# Altium PCB PCB1.PcbDoc
Units mil, origin at the board's own origin, x right, y up, seen from the top; angles counter-clockwise.
Board outline 6000 x 4000 mil, 2 copper layers (Top Layer, Bottom Layer); 56 components, 30 nets, 112 pads, 0 vias.
Unrouted connection lines stored in the file: 82.
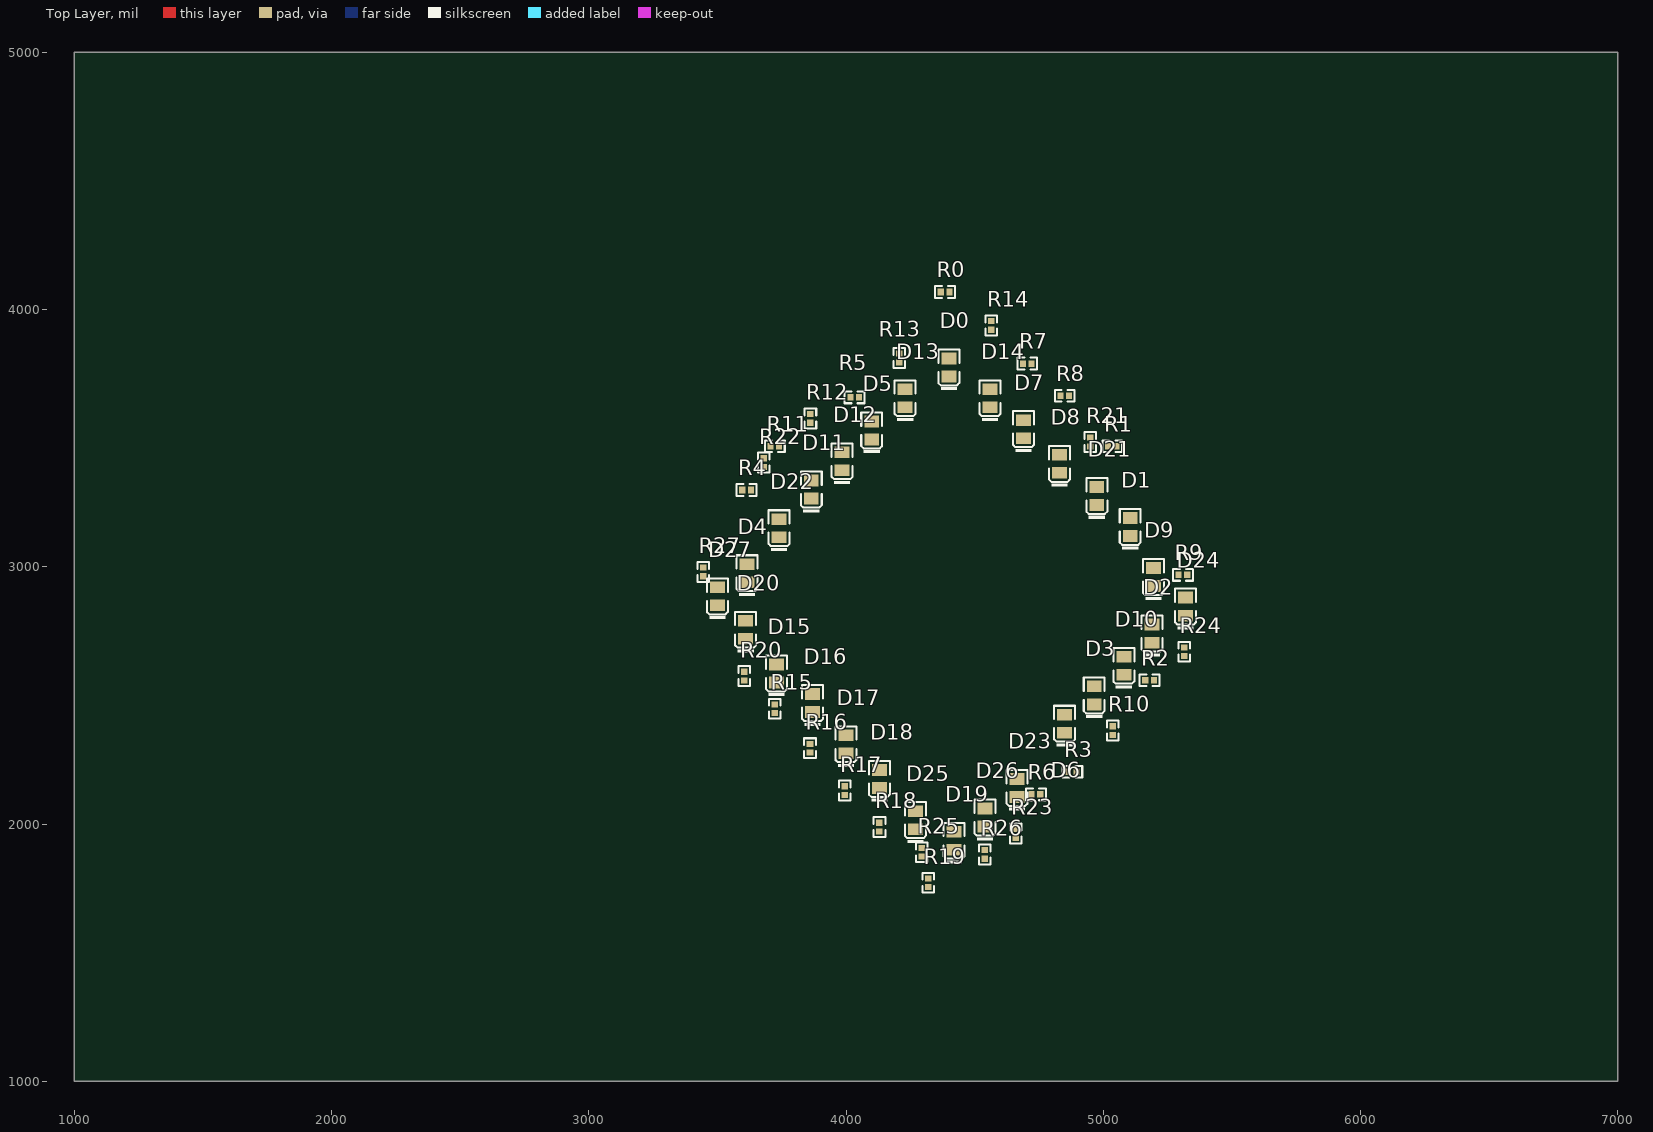
[diagram p0: Top Layer view]
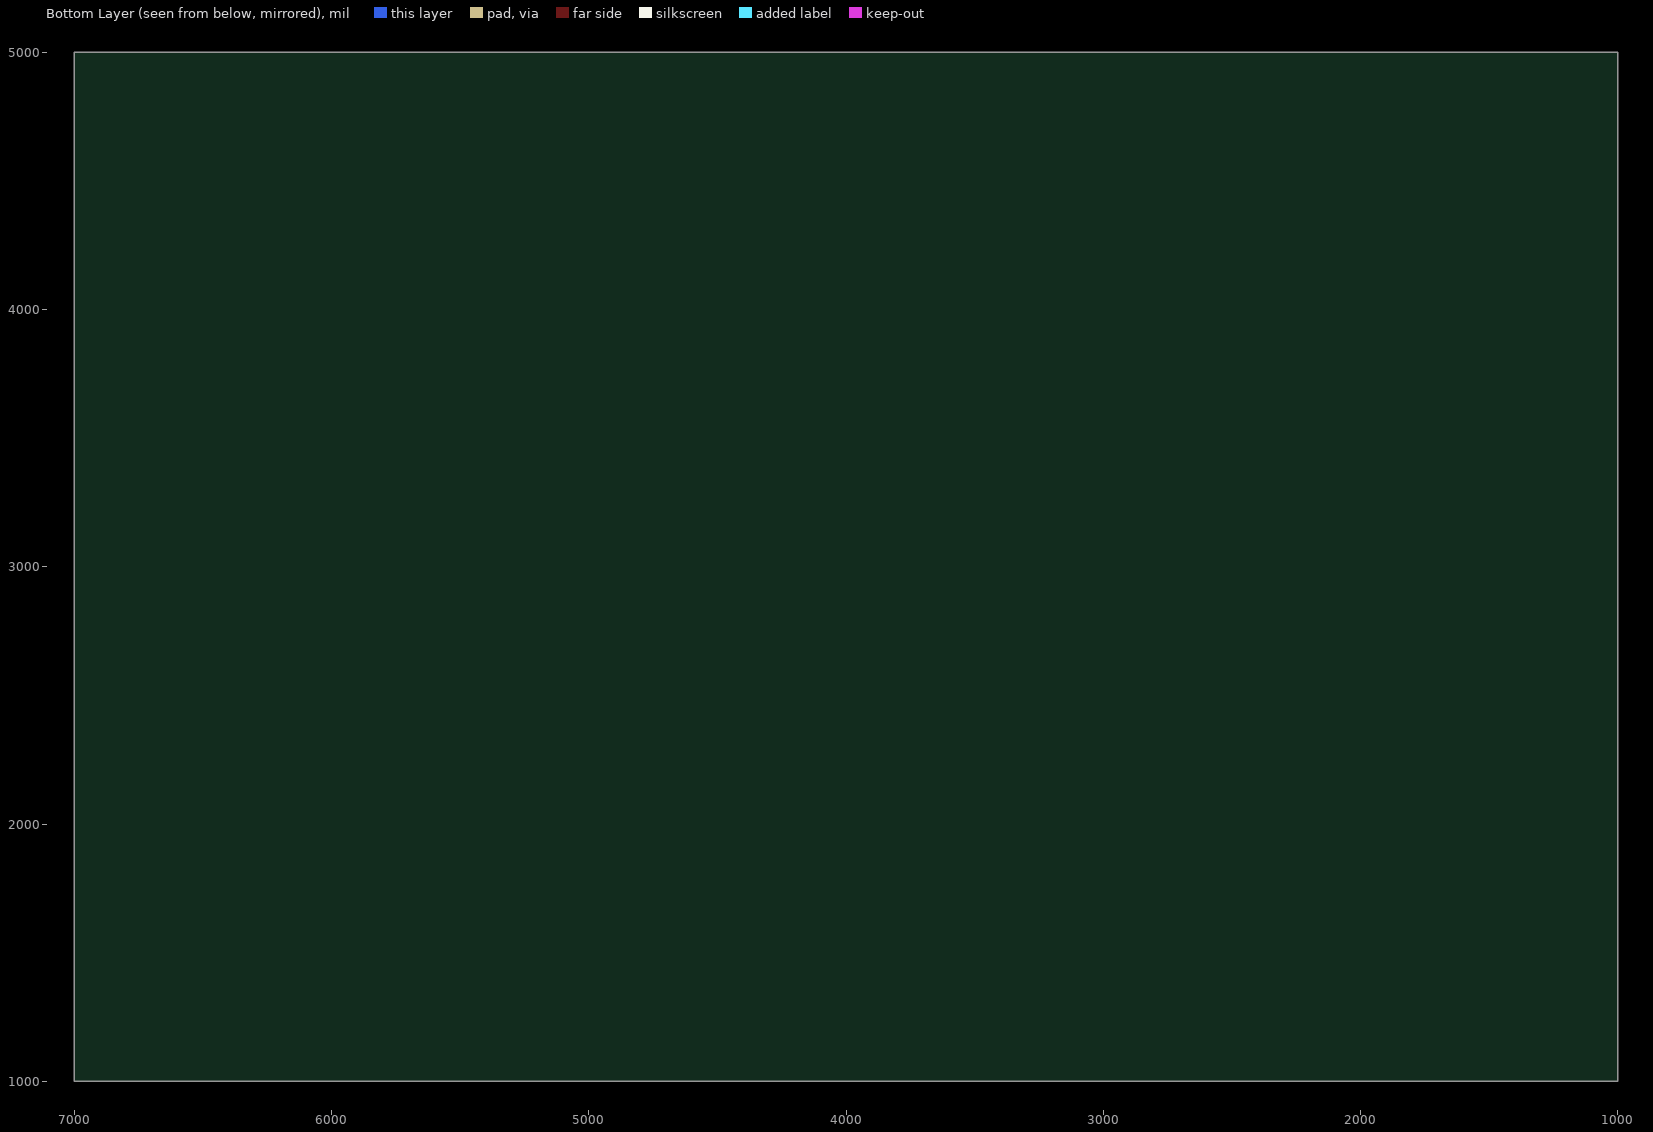
[diagram p1: Bottom Layer view, seen from below]

## Layer stack, top to bottom
Top Solder: solder mask 0.4, Solder Resist, Dk 3.5
Top Layer: signal copper 1.4
Dielectric 1: dielectric 12.6, FR-4, Dk 4.8
Bottom Layer: signal copper 1.4
Bottom Solder: solder mask 0.4, Solder Resist, Dk 3.5

## Board outline
1000,1000 7000,1000 7000,5000 1000,5000

## Design rules (kind name [scope] priority, off if disabled: settings)
Clearance [All] p1: gap=10 ignorepadtopadclearanceinfootprint=FALSE except(0: Arc-Hole Track-Hole SMDPad-Hole THPad-Hole Via-Hole Fill-Hole Poly-Hole Region-Hole Text-Hole)
PolygonConnect [All] p1: connectstyle=Relief reliefconductorwidth=10 reliefentries=4 polygonreliefangle="90 Angle" airgapwidth=10
RoutingVias [All] p1: holewidth=28 width=50 viastyle="Through Hole" minholewidth=28 minwidth=50 maxholewidth=28 maxwidth=50
SolderMaskExpansion [All] p1: expansion=4 istentingtop=FALSE
Width [All] p1: maxlimit=10 minlimit=10 preferedwidth=10
30 further rules are at their usual default settings.

## Components (designator, comment, footprint, x,y, rotation, side; value= is the part's Value field where it differs from the comment)
D0 "0805 Red" 0805_LED_S1 4400,3775.04 r90 top
D1 "0805 Red" 0805_LED_S1 5105,3155 r90 top
D2 "0805 Red" 0805_LED_S1 5190,2740.04 r90 top
D3 "0805 Red" 0805_LED_S1 4965,2500 r90 top
D4 "0805 Red" 0805_LED_S1 3615,2975.04 r90 top
D5 "0805 Red" 0805_LED_S1 4100,3530.04 r90 top
D6 "0805 Red" 0805_LED_S1 4850,2390.04 r90 top
D7 "0805 Red" 0805_LED_S1 4690,3535 r90 top
D8 "0805 Red" 0805_LED_S1 4830,3400.04 r90 top
D9 "0805 Red" 0805_LED_S1 5195,2959.96 r90 top
D10 "0805 Red" 0805_LED_S1 5080,2614.96 r90 top
D11 "0805 Red" 0805_LED_S1 3865,3300 r90 top
D12 "0805 Red" 0805_LED_S1 3985,3410 r90 top
D13 "0805 Red" 0805_LED_S1 4230,3655.04 r90 top
D14 "0805 Red" 0805_LED_S1 4560,3655.04 r90 top
D15 "0805 Red" 0805_LED_S1 3730,2585.04 r90 top
D16 "0805 Red" 0805_LED_S1 3870,2470 r90 top
D17 "0805 Red" 0805_LED_S1 4000,2310.04 r90 top
D18 "0805 Red" 0805_LED_S1 4130,2175.04 r90 top
D19 "0805 Red" 0805_LED_S1 4420,1935.04 r90 top
D20 "0805 Red" 0805_LED_S1 3610,2755 r90 top
D21 "0805 Red" 0805_LED_S1 4975,3275.04 r90 top
D22 "0805 Red" 0805_LED_S1 3740,3150.04 r90 top
D23 "0805 Red" 0805_LED_S1 4665,2140 r90 top
D24 "0805 Red" 0805_LED_S1 5320,2845.04 r90 top
D25 "0805 Red" 0805_LED_S1 4270,2015 r90 top
D26 "0805 Red" 0805_LED_S1 4540,2025 r90 top
D27 "0805 Red" 0805_LED_S1 3500,2884.96 r90 top
R0 "0Ω ±1%" 0402_R 4385.2,4068.27 r0 top
R1 "0Ω ±1%" 0402_R 5035,3468.27 r0 top
R2 "0Ω ±1%" 0402_R 5180,2558.27 r0 top
R3 "0Ω ±1%" 0402_R 4880,2203.27 r0 top
R4 "0Ω ±1%" 0402_R 3613.46,3298.27 r0 top
R5 "0Ω ±1%" 0402_R 4033.46,3658.27 r0 top
R6 "0Ω ±1%" 0402_R 4738.27,2115 r0 top
R7 "0Ω ±1%" 0402_R 4705,3790 r0 top
R8 "0Ω ±1%" 0402_R 4850,3665 r0 top
R9 "0Ω ±1%" 0402_R 5310,2968.27 r0 top
R10 "0Ω ±1%" 0402_R 5036.73,2363.27 r90 top
R11 "0Ω ±1%" 0402_R 3723.46,3468.27 r0 top
R12 "0Ω ±1%" 0402_R 3861.73,3576.54 r90 top
R13 "0Ω ±1%" 0402_R 4206.73,3811.54 r90 top
R14 "0Ω ±1%" 0402_R 4565.2,3938.27 r90 top
R15 "0Ω ±1%" 0402_R 3723.46,2448.27 r90 top
R16 "0Ω ±1%" 0402_R 3860,2295 r90 top
R17 "0Ω ±1%" 0402_R 3995,2130 r90 top
R18 "0Ω ±1%" 0402_R 4130,1988.27 r90 top
R19 "0Ω ±1%" 0402_R 4320,1771.54 r90 top
R20 "0Ω ±1%" 0402_R 3605,2575 r90 top
R21 "0Ω ±1%" 0402_R 4950,3485 r90 top
R22 "0Ω ±1%" 0402_R 3680,3405 r90 top
R23 "0Ω ±1%" 0402_R 4660,1963.27 r90 top
R24 "0Ω ±1%" 0402_R 5315,2670 r90 top
R25 "0Ω ±1%" 0402_R 4295,1890 r90 top
R26 "0Ω ±1%" 0402_R 4540,1881.73 r90 top
R27 "0Ω ±1%" 0402_R 3445,2980 r90 top

## Footprints (in the part's own frame and the unit in brackets; to place one, negate y for a bottom-side part, rotate by r counter-clockwise, add the part's x,y. Pads: shape width x height; smd on the part's side, far side on the other; paste and mask are expansions set on the pad)
0402_R [mm]
  rect 0.6x0.65 smd mask+0.051: 1(-0.425,0) 2(0.425,0)
  silkscreen extent -0.97,-0.58 0.97,0.58, body extent -0.57,-0.27 0.58,0.28, height 0.41
0805_LED_S1 [mm]
  rect 1.16x1.47 smd: A(0.89,0) K(-0.89,0)
  silkscreen extent -2.24,-1.04 1.77,1.03, body extent -1.01,-0.62 1.01,0.62, height 1.1

## Part data
D0 D1 D2 D3 D4 D5 D6 D7 D8 D9 D10 D11 D12 D13 D14 D15 D16 D17 D18 D19 D20 D21 D22 D23 D24 D25 D26 D27: library part "0805 LED Red", "LED", Color=Red, Package=0805, SuppliersPartNumber=C2295, ComponentLink1Description=供应商链接, ComponentLink1URL=http://www.szlcsc.com/product/details_2668.html, Supplier=LC
R0 R1 R2 R3 R4 R5 R6 R7 R8 R9 R10 R11 R12 R13 R14 R15 R16 R17 R18 R19 R20 R21 R22 R23 R24 R25 R26 R27: library part "0402 0R (0R0) 1%", "Chip resistor", Manufacturer="Uniroyal Elec", Package=0402, PartNumber=0402WGF0000TCE, Power=1/16W, Resistance=0Ω, SuppliersPartNumber=C17168, Tolerance=1%, ComponentLink1Description="Supplier link", ComponentLink1URL=http://www.szlcsc.com/product/details_17853.html, Supplier=LC

## Nets (pads, with @x,y where several pads share a name; then routed paths per layer and width w, separated by ;. In a path a pad name is that pad's centre, name@x,y a point inside that pad or via, vN(x,y) a via of type N, cw(c..) or ccw(c..) an arc to the next point about the centre after c; other vN are vias at no path point)
GND: D0.K D1.K D2.K D3.K D4.K D5.K D6.K D7.K D8.K D9.K D10.K D11.K D12.K D13.K D14.K D15.K D16.K D17.K D18.K D19.K D20.K D21.K D22.K D23.K D24.K D25.K D26.K D27.K
NetD0_A: D0.A R0.2
NetD1_A: D1.A R1.2
NetD2_A: D2.A R2.2
NetD3_A: D3.A R3.2
NetD4_A: D4.A R4.2
NetD5_A: D5.A R5.2
NetD6_A: D6.A R6.2
NetD7_A: D7.A R7.2
NetD8_A: D8.A R8.2
NetD9_A: D9.A R9.2
NetD10_A: D10.A R10.2
NetD11_A: D11.A R11.2
NetD12_A: D12.A R12.2
NetD13_A: D13.A R13.2
NetD14_A: D14.A R14.2
NetD15_A: D15.A R15.2
NetD16_A: D16.A R16.2
NetD17_A: D17.A R17.2
NetD18_A: D18.A R18.2
NetD19_A: D19.A R19.2
NetD20_A: D20.A R20.2
NetD21_A: D21.A R21.2
NetD22_A: D22.A R22.2
NetD23_A: D23.A R23.2
NetD24_A: D24.A R24.2
NetD25_A: D25.A R25.2
NetD26_A: D26.A R26.2
NetD27_A: D27.A R27.2
VCC: R0.1 R1.1 R2.1 R3.1 R4.1 R5.1 R6.1 R7.1 R8.1 R9.1 R10.1 R11.1 R12.1 R13.1 R14.1 R15.1 R16.1 R17.1 R18.1 R19.1 R20.1 R21.1 R22.1 R23.1 R24.1 R25.1 R26.1 R27.1